# Altium PCB InertiaScreen_CurriculumDesign.PcbDoc
Units mil, origin at the board's own origin, x right, y up, seen from the top; angles counter-clockwise.
Board outline 990 x 1040 mil, 2 copper layers (Top Layer, Bottom Layer), stack 81.54 mil thick; 19 components, 28 nets, 100 pads, 30 vias.
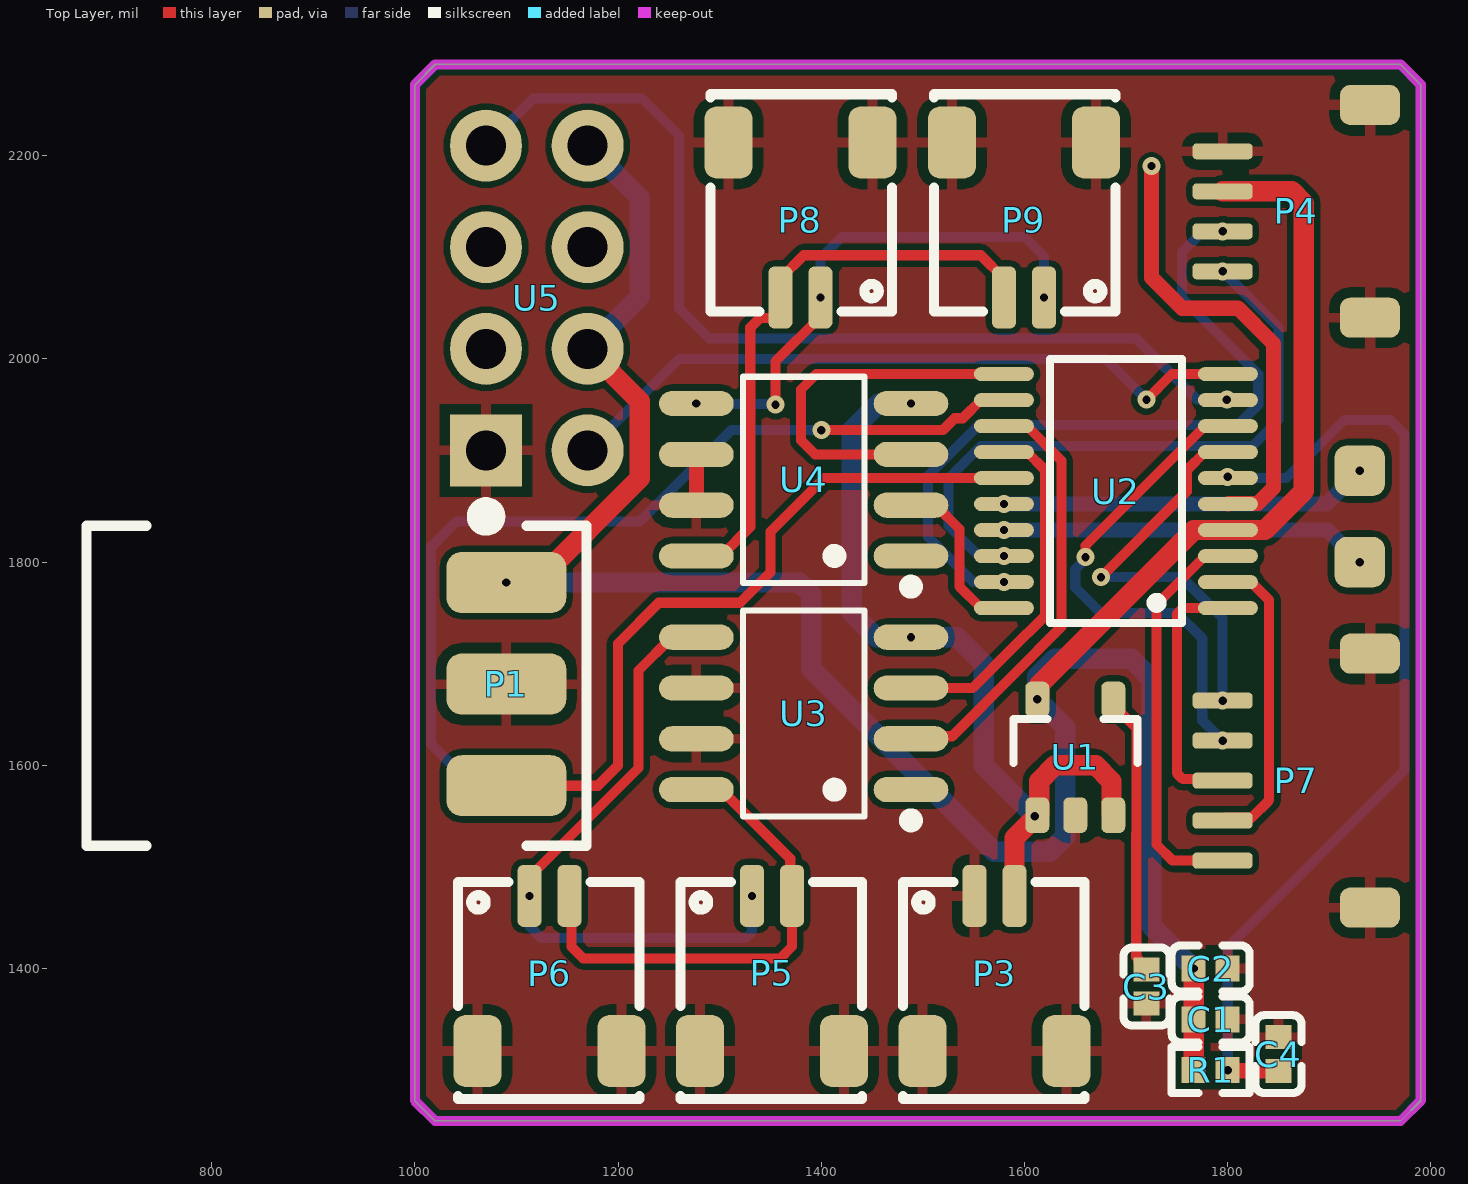
[diagram p0: Top Layer view]
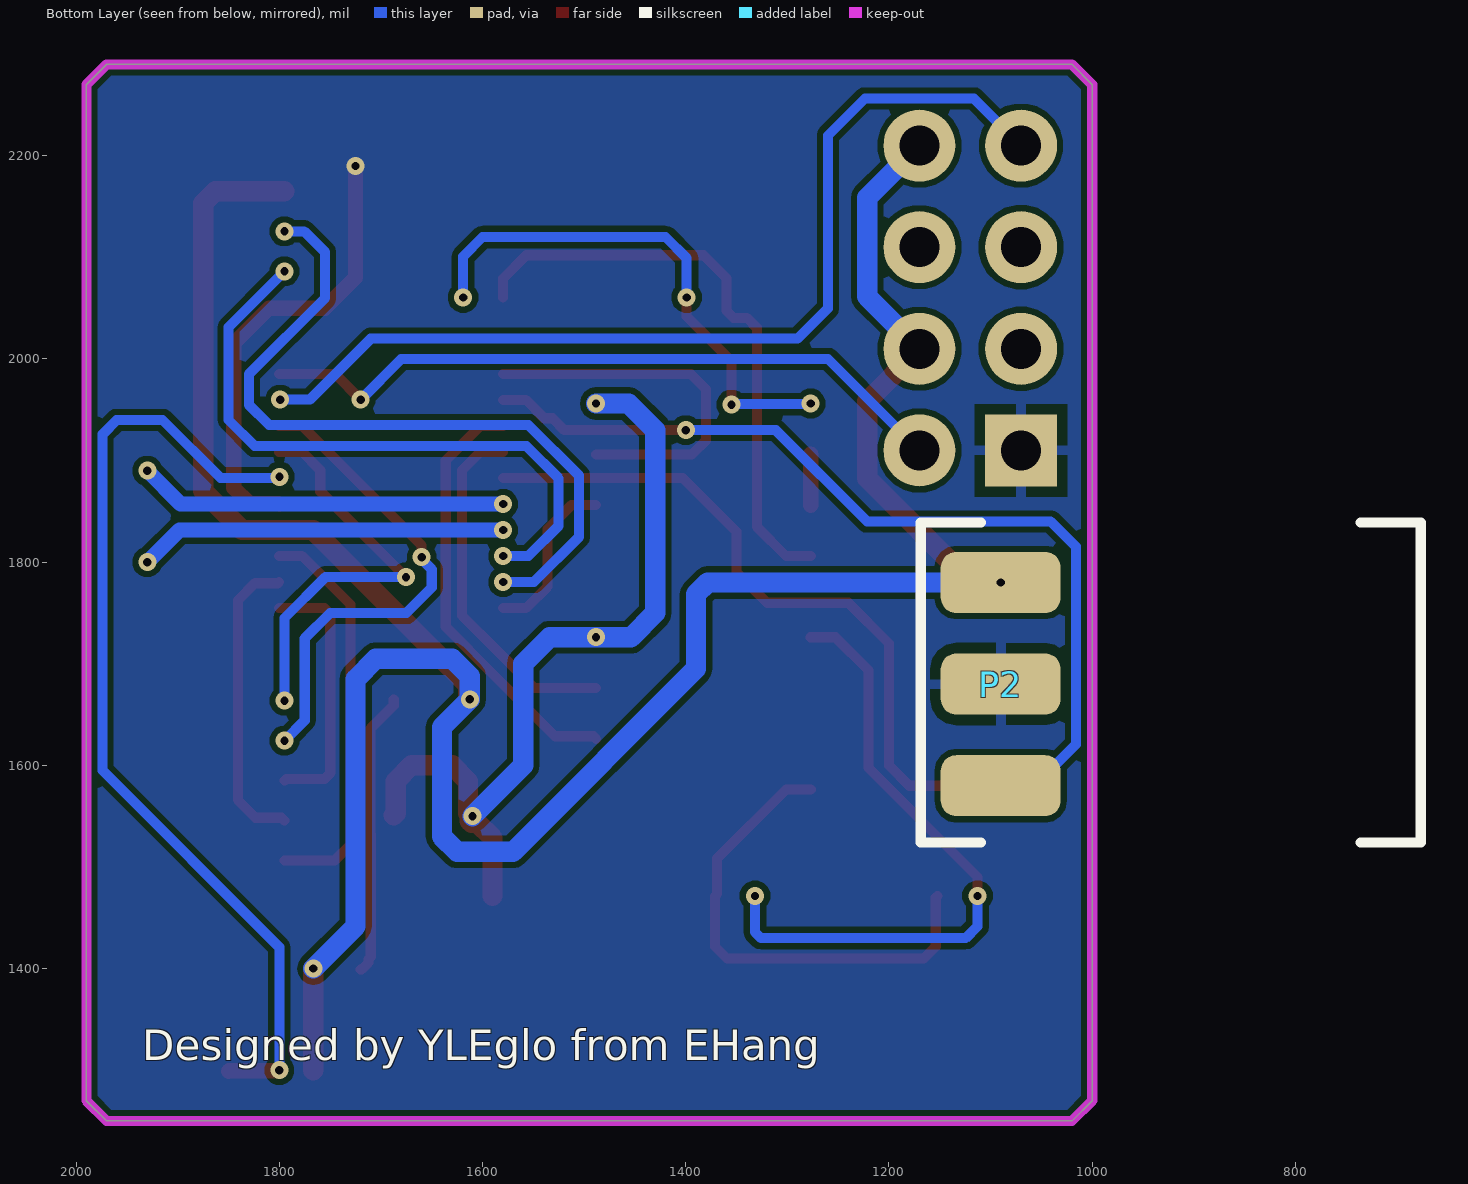
[diagram p1: Bottom Layer view, seen from below]
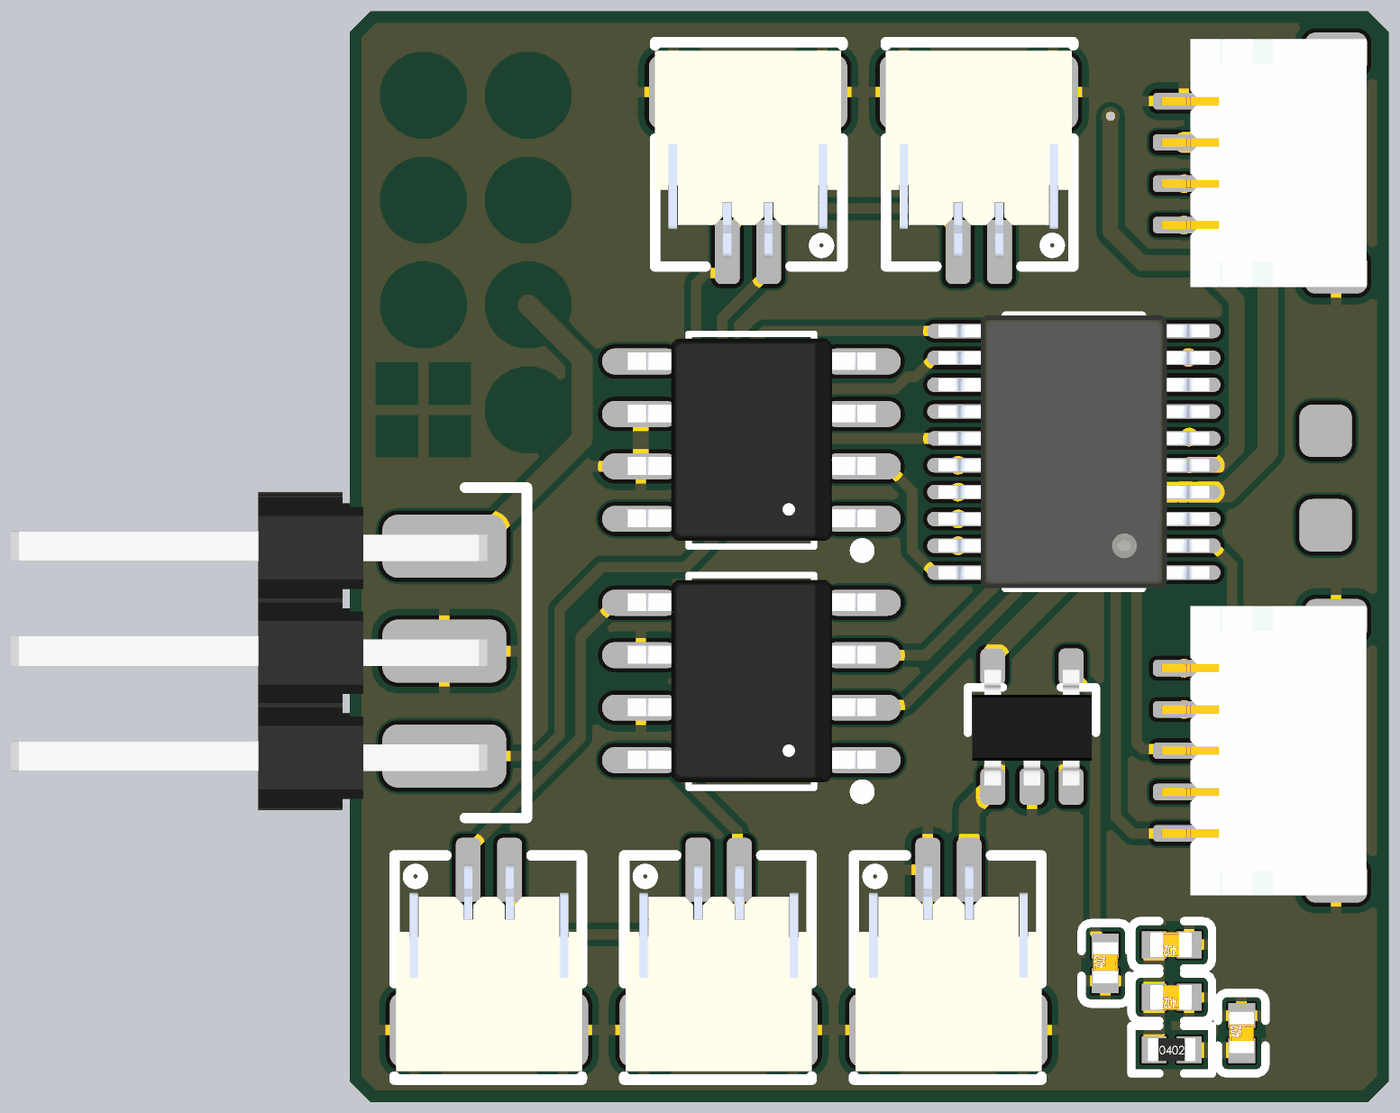
[diagram p2: 3D render of the assembled board from above, using the file's embedded part models]

## Layer stack, top to bottom
Top Solder: solder mask 0.4, Solder Resist, Dk 3.5
Top Layer: signal copper 1.4
Dielectric 1: dielectric 78.7402, FR-4, Dk 4.8
Bottom Layer: signal copper 1.4
Bottom Solder: solder mask 0.4, Solder Resist, Dk 3.5

## Board outline
1000,1270 1000,2270 1020,2290 1970,2290 1990,2270 1990,1270 1970,1250 1020,1250

## Design rules (kind name [scope] priority, off if disabled: settings)
Clearance [All] p1: gap=6 ignorepadtopadclearanceinfootprint=FALSE
HoleSize [All] p1: absolutevalues=TRUE maxlimit=248.03 minlimit=7.87 maxpercent=80.000 minpercent=20.000
PolygonConnect [All] p1: thpad.connectstyle=Relief thpad.reliefconductorwidth=10 thpad.reliefentries=4 thpad.polygonreliefangle="90 Angle" thpad.airgapwidth=10 smdpad.connectstyle=Relief smdpad.reliefconductorwidth=10 smdpad.reliefentries=4 smdpad.polygonreliefangle="90 Angle" smdpad.airgapwidth=10 via.connectstyle=Direct via.reliefconductorwidth=10 via.reliefentries=4 via.polygonreliefangle="90 Angle" via.airgapwidth=10
RoutingVias [All] p1: holewidth=16 width=28 viastyle="Through Hole" minholewidth=12 minwidth=25 maxholewidth=24 maxwidth=40
SolderMaskExpansion [All] p1: expansion=4 istentingtop=FALSE
Width PWR [InNetClass('PWR')] p1: maxlimit=100 minlimit=20 preferedwidth=30
Width GND [InNetClass('GND')] p2: maxlimit=50 minlimit=15 preferedwidth=30
Width [All] p3: maxlimit=100 minlimit=10 preferedwidth=20
29 further rules are at their usual default settings.

## Classes and differential pairs
net class PWR: VCC_3.3V VCC_7.2V
net class GND: GND

## Components (designator, comment, footprint, x,y, rotation, side; value= is the part's Value field where it differs from the comment)
C1 "10uF" 0402_C 1783.27,1350 r180 top
C2 "100nF" 0402_C 1783.27,1400 r180 top
C3 "10nF" 0402_C 1720,1382.28 r90 top
C4 "100nF" 0402_C 1850,1315.75 r90 top
P1 "Pin 3P LIEDOWN" "Pin 3P LieDown" 1070.32,1580 r90 top
P2 "Pin 3P LIEDOWN" "Pin 3P LieDown" 1070.32,1780 r270 bottom
P3 "SH1.00mm 2P" SH1.0-2P 1575,1377 r180 top
P4 "SH1.0-4P" SH1.0-4P 1795,2145.31 r90 top
P5 "SH1.00mm 2P" SH1.0-2P 1356,1377 r180 top
P6 "SH1.00mm 2P" SH1.0-2P 1137,1377 r180 top
P7 "SH1.0-5P" SH1.0-5P 1795,1585 r90 top
P8 "SH1.00mm 2P" SH1.0-2P 1375,2155 r0 top
P9 "SH1.00mm 2P" SH1.0-2P 1595,2155 r0 top
R1 "10KΩ" 0402_R 1783.27,1300 r0 top
U1 "LP2992" SOT23-5 1650,1610 r90 top
U2 "STM32G030F6P6-TSSOP-20" TSSOP-20 1690,1870 r180 top
U3 "TC118S" SOP-8 1380,1650 r90 top
U4 "TC118S" SOP-8 1380,1880 r90 top
U5 "ESP-01S" ESP-01S-NoSlik 754.05,2047.4 r180 top

## Footprints (in the part's own frame and the unit in brackets; to place one, negate y for a bottom-side part, rotate by r counter-clockwise, add the part's x,y. Pads: shape width x height; smd on the part's side, far side on the other; paste and mask are expansions set on the pad)
0402_C [mm]
  rect 0.6x0.65 smd mask+0.051: 1(-0.425,0) 2(0.425,0)
  silkscreen extent -0.97,-0.58 0.97,0.58, body extent -0.48,-0.3 0.52,0.3, height 0.2
0402_R [mm]
  rect 0.6x0.65 smd mask+0.051: 1(-0.425,0) 2(0.425,0)
  silkscreen extent -0.97,-0.58 0.97,0.58, body extent -0.57,-0.27 0.58,0.28, height 0.41
ESP-01S-NoSlik [mm]
  rect 1.8x1.8 hole 1: 1(-8.025,3.49)
  round 1.8 hole 1: 2(-8.025,0.95) 3(-8.025,-1.59) 4(-8.025,-4.13) 5(-10.565,3.49) 6(-10.565,0.95) 7(-10.565,-1.59) 8(-10.565,-4.13)
  silkscreen extent -8.26,4.91 -7.79,5.37, body extent -11.86,-5.41 -6.78,4.75, height 8.58
"Pin 3P LieDown" [mm] "排针卧贴 3P"
  rrect50% 1.524x3 smd: 1(0,-0.5) 2(2.54,-0.5) 3(5.08,-0.5)
  silkscreen extent -1.5,-2.5 6.5,10, body extent -1.31,-1.54 6.31,10, height 1.65
SH1.0-2P [mm] "SH1.00mm 2P 卧贴"
  rrect50% 0.6x1.55 smd: 1(0.614,-2.4) 2(-0.386,-2.4)
  rrect50% 1.2x1.8 smd: 3(-1.686,1.475) 4(1.914,1.475)
  silkscreen extent -2.14,-2.75 2.4,2.68, body extent -2.14,-2.53 2.36,2.48, height 3.18
SH1.0-4P [mm]
  rrect50% 0.4x1.5 smd: 1(-1.5,0) 2(-0.5,0) 3(0.5,0) 4(1.5,0)
  rrect50% 1x1.5 smd: SH1(-2.659,-3.683) SH2(2.659,-3.683)
  body extent -3,-4.42 3,0.54, height 3.14
SH1.0-5P [mm]
  rrect50% 0.4x1.5 smd: 1(-2,0) 2(-1,0) 3(0,0) 4(1,0) 5(2,0)
  rrect50% 1x1.5 smd: SH1(-3.175,-3.683) SH2(3.175,-3.683)
  body extent -3.5,-4.42 3.5,0.54, height 3.06
SOP-8 [mm]
  oval 0.63x1.865 smd: 1(-1.877,-2.751) 2(-0.607,-2.751) 3(0.663,-2.751) 4(1.933,-2.751) 5(1.933,2.614) 6(0.663,2.614) 7(-0.607,2.614) 8(-1.877,2.614)
  silkscreen extent -2.79,-2.9 2.6,1.45, body extent -2.41,-3.08 2.49,2.92, height 1.5
SOT23-5 [mm]
  rrect50% 0.889x0.6 smd: 1(-1.5,0.95) 2(-1.5,0) 3(-1.5,-0.95) 4(1.396,-0.95) 5(1.396,0.95)
  silkscreen extent -0.2,-1.55 0.9,1.55, body extent -1.48,-1.45 1.32,1.45, height 1.2
TSSOP-20 [mm]
  oval 1.5x0.35 smd: 1(-2.8,2.925) 2(-2.8,2.275) 3(-2.8,1.625) 4(-2.8,0.975) 5(-2.8,0.325) 6(-2.8,-0.325) 7(-2.8,-0.975) 8(-2.8,-1.625) 9(-2.8,-2.275) 10(-2.8,-2.925) 11(2.8,-2.925) 12(2.8,-2.275) 13(2.8,-1.625) 14(2.8,-0.975) 15(2.8,-0.325) 16(2.8,0.325) 17(2.8,0.975) 18(2.8,1.625) 19(2.8,2.275) 20(2.8,2.925)
  silkscreen extent -1.65,-3.3 1.65,3.3, body extent -3.27,-3.3 3.27,3.3, height 1.2

## Part data
C1: library part "0402 10uF (106) 20% 6.3V", "贴片电容", Package=0402, SuppliersPartNumber=C15525, ComponentLink1Description=供应商链接, ComponentLink1URL=http://www.szlcsc.com/product/details_16204.html, Supplier=LC
C2 C4: library part "0402 100nF (104) 10% 16V", "贴片电容", Package=0402, SuppliersPartNumber=C1525, ComponentLink1Description=供应商链接, ComponentLink1URL=http://www.szlcsc.com/product/details_1877.html, Supplier=LC
C3: library part "0402 10nF (103) 10% 50V", "贴片电容", Package=0402, SuppliersPartNumber=C15195, ComponentLink1Description=供应商链接, ComponentLink1URL=http://www.szlcsc.com/product/details_15869.html, Supplier=LC
P1 P2: "排针卧贴 3P"
P3 P5 P6 P8 P9: "SH1.00mm 2P 卧贴"
P4: "SH1.00mm 4P 卧贴"
P7: "SH1.00mm 5P 卧贴"
R1: library part "0402 10KΩ (1002) 1%", "贴片电阻", Package=0402, SuppliersPartNumber=C25744, ComponentLink1Description=供应商链接, ComponentLink1URL=http://www.szlcsc.com/product/details_26487.html, Supplier=LC
U1: "LDO 5.x-3.3V"
U3 U4: "TC118S FM单路直流电机驱动"
U5: "ESP01S开发板"

## Free pads (board coordinates)
  rrect50% 50x50 smd: 9(1930,1890) 10(1930,1800)

## Via types
v1: diameter 17.72, hole 8.2, Top Layer to Bottom Layer, tented both sides, 30 vias

## Nets (pads, with @x,y where several pads share a name; then routed paths per layer and width w, separated by ;. In a path a pad name is that pad's centre, name@x,y a point inside that pad or via, vN(x,y) a via of type N, cw(c..) or ccw(c..) an arc to the next point about the centre after c; other vN are vias at no path point)
GND: C1.1 C2.1 C3.1 C4.2 P1.2 P2.2 P3.1 P3.3 P3.4 P4.4 P4.SH1 P4.SH2 P5.3 P5.4 P6.3 P6.4 P7.SH1 P7.SH2 P8.3 P8.4 P9.3 P9.4 U1.2 U2.5 U3.6 U3.7 U4.6 U4.7 U5.1 | length 500.1
  Top Layer w15: U4.7 U4.6 ; v1(1725,2190) 1725,2080 1755,2050 1810,2050 1845,2015 1845,1873.23 1829.58,1857.81 1800.85,1857.81 U2.5
IO0: U5.3
IO2: U5.2
NetC3_2: C3.2 U1.4 | length 280.2
  Top Layer w10: U1.4 1687.4,1659.26 1710.21,1636.44 1710.21,1532.35 1710,1532.14 1710,1411.68 1712.2,1409.48 1712.2,1405.83 1719.02,1399.02 C3.2
NetC4_1: C4.1 R1.2 U2.6 | length 952.6
  Top Layer w15: v1(1800,1300) 1800.49,1299.51 1849.51,1299.51 C4.1
  Bottom Layer w10: v1(1799.91,1884.07) 1801.19,1882.8 1857.8,1882.8 1915,1940 1960,1940 1974,1926 1974,1595 1800,1421 v1(1800,1300)
OUT1A: P5.2 P6.2 U3.8 | length 485.1
  Top Layer w10: P6.2 1154.01,1469.68 1154.01,1421.72 1165.72,1410 1359.48,1410 1371.2,1421.72 P5.2 1369.39,1473.3 1369.39,1508.11 1301.38,1576.12 U3.8
OUT1B: P5.1 P6.1 U3.5 | length 628.6
  Top Layer w10: v1(1112.83,1471.49) 1112.83,1490.19 1220,1597.36 1220,1693.36 1252.76,1726.12 U3.5
  Bottom Layer w10: v1(1112.83,1471.49) 1112.83,1441.72 1124.54,1430 1325.97,1430 1331.83,1435.86 v1(1331.83,1471.49)
OUT2A: P8.2 P9.2 U4.8 | length 587
  Top Layer w10: U4.8 1301.38,1806.12 1330,1834.74 1330,2030.71 1339.76,2040.47 1353.06,2040.47 1359.8,2047.22 1359.8,2079.21 1382.61,2102.02 1556.99,2102.02 1579.8,2079.21 P9.2
OUT2B: P8.1 P9.1 U4.5 | length 517.8
  Top Layer w10: v1(1355,1955) 1355,1997.64 1399.17,2041.81 v1(1399.17,2060.51)
  Bottom Layer w10: v1(1277.07,1956.12) 1277.63,1955.56 1354.44,1955.56 v1(1355,1955) ; v1(1399.17,2060.51) 1399.17,2099.17 1420,2120 1600,2120 1619.17,2100.83 v1(1619.17,2060.51)
PA0: P7.5 U2.7 | length 405.7
  Top Layer w10: v1(1675.3,1785.3) 1759.71,1869.71 1759.71,1890.5 1777.6,1908.39 U2.7
  Bottom Layer w10: v1(1675.3,1785.3) 1754.7,1785.3 1795,1745 v1(1795,1663.74)
PA1: P7.4 U2.8 | length 489.1
  Top Layer w10: v1(1660,1805) 1660,1816.38 1777.6,1933.98 U2.8
  Bottom Layer w10: v1(1660,1805) 1660,1802.91 1650,1792.91 1650,1775 1675,1750 1750,1750 1775,1725 1775,1644.37 v1(1795,1624.37)
PA5: P2.3 U2.12 | length 908.8
  Top Layer w10: v1(1400,1930) 1519.57,1930 1531.25,1941.68 1539.24,1941.68 1557.13,1959.57 U2.12
  Bottom Layer w10: P2.3 1056.86,1580 1016,1620.86 1016,1815.14 1040.86,1840 1221.46,1840 1311.46,1930 v1(1400,1930)
PA8: P1.1 U2.15 | length 708.9
  Top Layer w10: P1.1 1180,1580 1200,1600 1200,1720 1240,1760 1320,1760 1350,1790 1350,1830 1402.72,1882.72 1522.65,1882.72 1522.73,1882.8 U2.15
PB7: P7.3 U2.1 | length 257.3
  Top Layer w10: P7.3 1793.51,1586.49 1755.86,1586.49 1750,1592.35 1750,1748.98 1755.86,1754.84 U2.1
PC14: P7.2 U2.2 | length 298.8
  Top Layer w10: P7.2 1797.87,1548.5 1823.5,1548.5 1840.76,1565.76 1840.76,1762.54 1824.11,1779.2 1801.47,1779.2 U2.2
PC15: P7.1 U2.3 | length 397.8
  Top Layer w10: P7.1 1745.86,1506.26 1730,1522.12 1730,1758.43 1777.6,1806.02 U2.3
PWM1A: U2.13 U3.2 | length 428
  Top Layer w10: U3.2 1490.9,1628.73 1528.73,1628.73 1590,1690 1636.29,1736.29 1636.29,1900.09 1602.4,1933.98 U2.13
PWM1B: U2.14 U3.3 | length 352.5
  Top Layer w10: U3.3 1548.98,1676.12 1586.05,1713.19 1620.29,1747.43 1620.29,1890.5 1602.4,1908.39 U2.14
PWM2A: U2.20 U4.2 | length 166.7
  Top Layer w10: U4.2 1512.6,1856.12 1536,1832.72 1536,1775.97 1557.13,1754.84 U2.20
PWM2B: U2.11 U4.3 | length 370.1
  Top Layer w10: U4.3 1393.88,1906.12 1380,1920 1380,1970 1395.16,1985.16 U2.11
RxD: U2.10 U5.5 | length 694.5
  Top Layer w10: v1(1720,1960) 1745.16,1985.16 U2.10
  Bottom Layer w10: U5.5 1260,2000 1680,2000 v1(1720,1960)
SCL: pad.9 U2.16 | length 363.8
  Bottom Layer w15: v1(1579.76,1857.2) 1897.2,1857.2 v1(1930,1890)
SDA: pad.10 U2.17 | length 363.3
  Bottom Layer w15: v1(1579.76,1831.61) 1898.39,1831.61 v1(1930,1800)
SWCLK: P4.2 U2.19 | length 736.8
  Bottom Layer w10: v1(1579.76,1780.43) 1549.57,1780.43 1505,1825 1505,1885 1555,1935 1810,1935 1830,1955 1830,1985 1755,2060 1755,2105 1775.63,2125.63 v1(1795,2125.63)
SWDIO: P4.1 U2.18 | length 631.3
  Bottom Layer w10: v1(1579.76,1806.02) 1554.98,1806.02 1525.14,1835.86 1525.14,1882.51 1556.97,1914.34 1824.34,1914.34 1850,1940 1850,2031.26 v1(1795,2086.26)
TxD: U2.9 U5.4 | length 970.7
  Bottom Layer w10: U5.4 1116.43,2256.43 1223.57,2256.43 1260,2220 1260,2050 1290,2020 1710,2020 1770,1960 v1(1799.14,1960)
VCC_3.3V: C1.2 C2.2 P1.3 P2.1 P4.3 R1.1 U1.5 U2.4 U5.6 U5.8 | length 2701.9
  Top Layer w20: v1(1090,1780) 1119.06,1780 1221.43,1882.38 1221.43,1958.57 U5.6 ; U1.5@1612.6,1670.63 v1(1612.6,1664.94) 1614.41,1666.76 1614.41,1679.41 1766.61,1831.61 U2.4 1836.61,1831.61 1875,1870 1875,2153.28 1863.28,2165 P4.3 ; R1.1 v1(1766.54,1400)
  Bottom Layer w20: v1(1090,1780) 1378.28,1780 1390,1768.28 1390,1695 1570,1515 1625,1515 1640,1530 1640,1637.54 v1(1612.6,1664.94) 1612.6,1687.6 1630,1705 1705,1705 1725,1685 1725,1441.54 v1(1766.54,1400) ; U5.6 1221.43,2061.43 1221.43,2158.57 U5.8
VCC_7.2V: P3.2 U1.1 U1.3 U3.4 U4.4 | length 815.1
  Top Layer w20: P3.2 1590.2,1528.54 1605.1,1543.44 1610.79,1543.44 1612.6,1545.26 U1.1 1614.41,1552.76 1614.41,1584.41 1630,1600 1670,1600 1685.59,1584.41 1685.59,1552.76 U1.3
  Bottom Layer w20: v1(1488.29,1956.12) 1456.12,1956.12 1430,1930 1430,1750 1453.88,1726.12 v1(1488.29,1726.12) 1533.88,1726.12 1560,1700 1560,1600 v1(1610,1550)
pads on no net: U3.1 U4.1 U5.7

## Polygon pours and split planes (outlines as drawn)
GND on Bottom Layer "GND_L02_P000" (solid, pour order 0): 1000,2285 1000,1250 1990,1250 1995,1255 1995,2290
GND on Top Layer "GND_L01_P001" (solid, pour order 1): 1000,2285 1000,1250 1990,1250 1995,1255 1995,2290

## Keep-outs
Keep-Out Layer:
  the board outline again, w10

## Other copper
Top Layer:
  pour cut-out: 1761.22,1743.63 1761.22,1680.17 1761.73,1679.66 1829.55,1679.66 1829.55,1738.24 1824.17,1743.63
  pour cut-out: 1719.64,1762.72 1715,1767.36 1715,1770 1718.07,1770 1757.32,1809.25 1759.6,1806.97 1762.11,1806.97

## Silkscreen, mask and mechanical layers (free items; w line width, h text height)
Bottom Overlay:
  text "Designed by YLEglo from EHang" at 1935,1310 h30